# EAGLE board INVERTER (EAGLE 7.5.0)
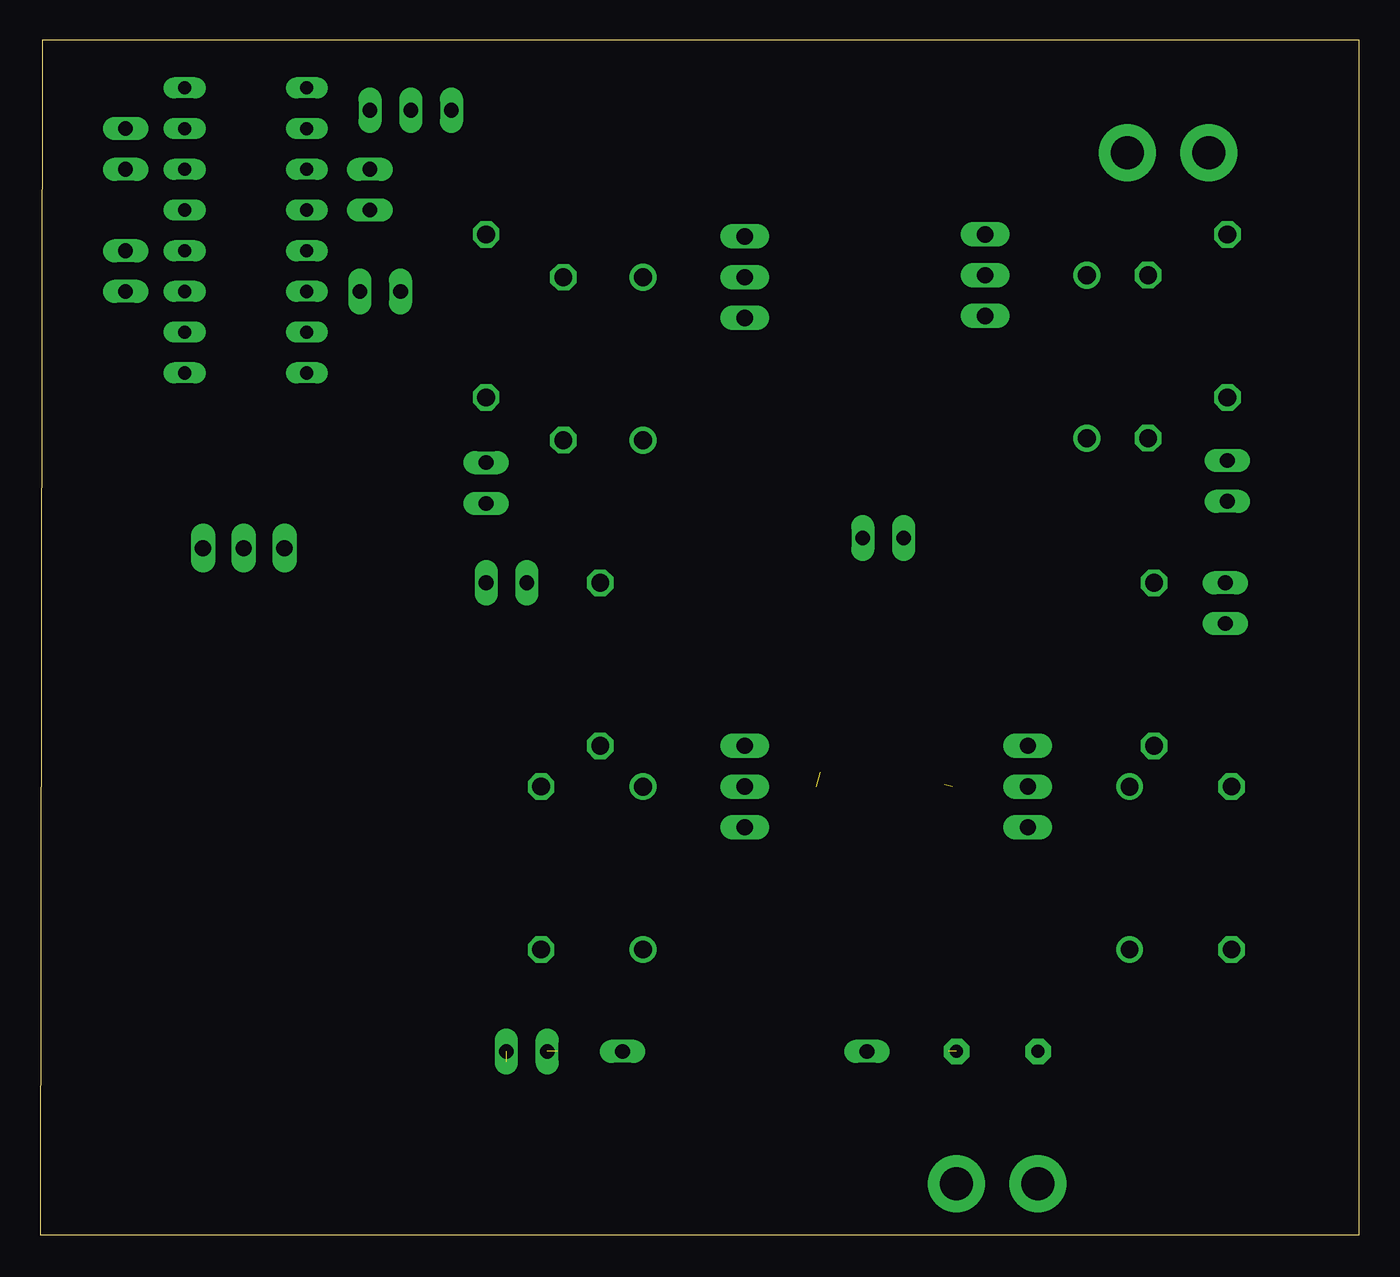
[diagram p0: board, top side]
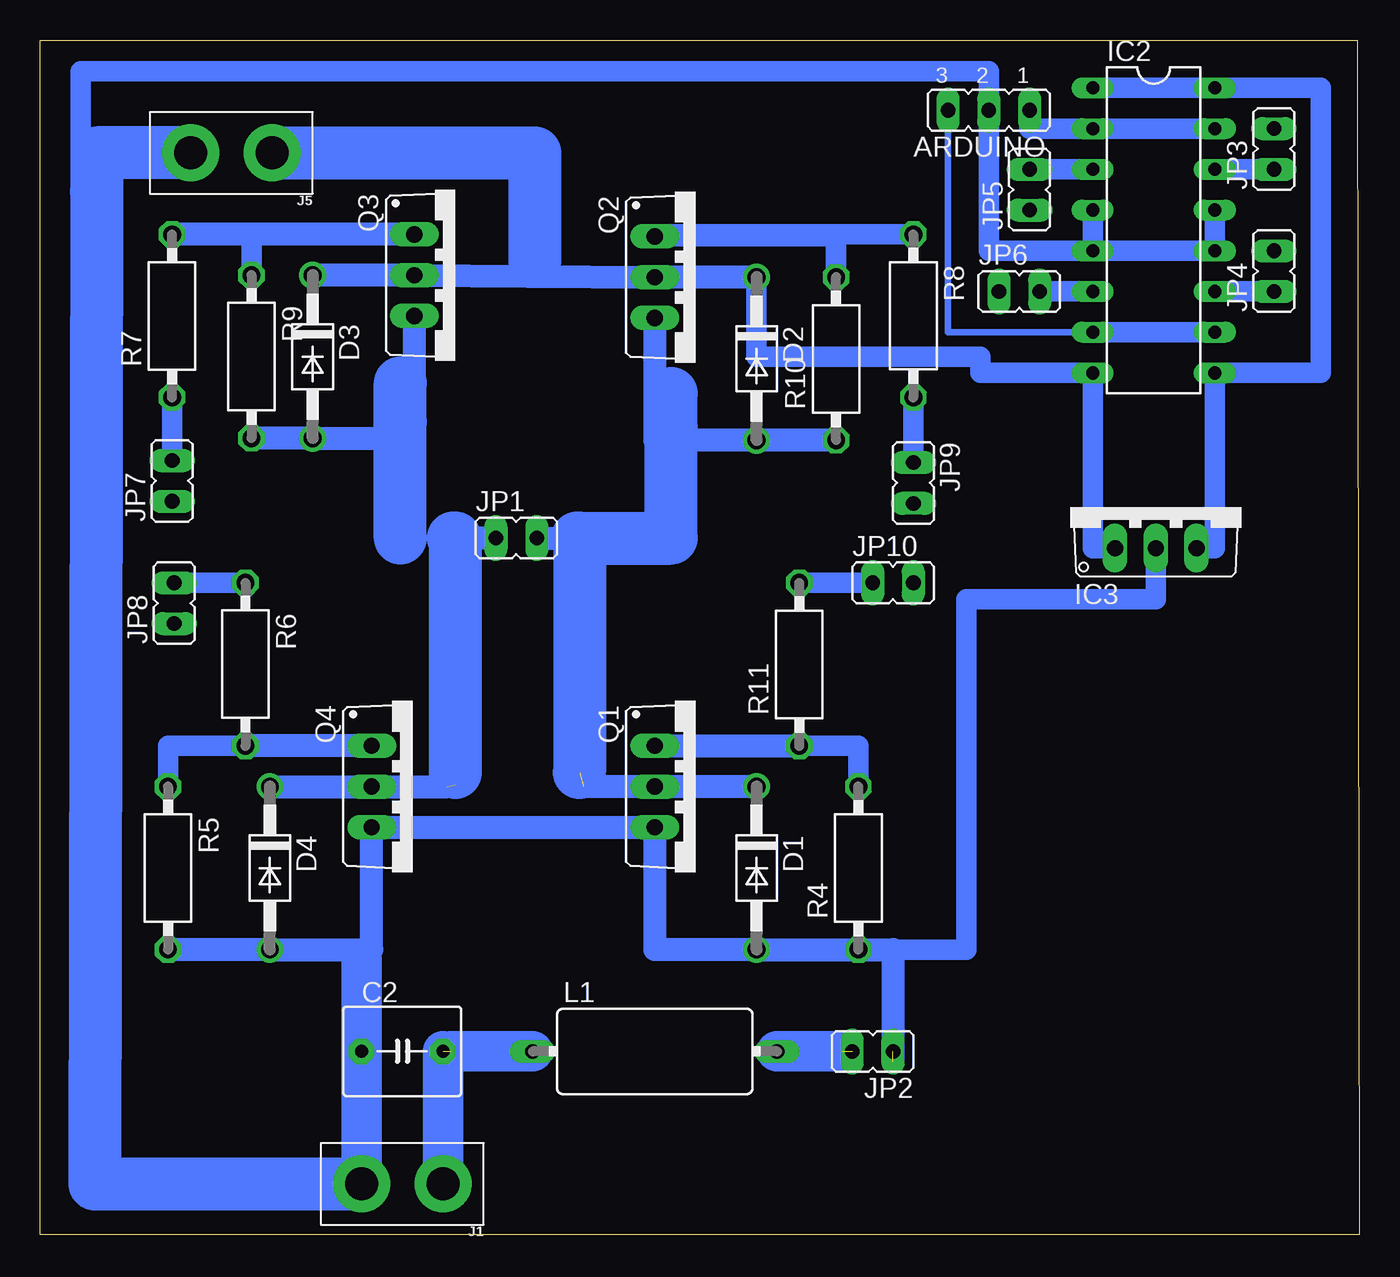
[diagram p1: board, bottom side, seen from below]

Size 82.28 x 74.47 mm. Coordinates in mm from the lower left corner, seen from the top.
Outline: 0,0 82.28,0 82.28,74.47 0.13,74.47 0,0
Copper layers (1*16): Top 0.035mm / dielectric 1.5mm / Bottom 0.035mm
Design rules "default": minimum track width 10mil, minimum drill 24mil, track to track 8mil, track to pad 8mil, pad to pad 8mil, via to via 8mil, smd to smd 8mil, copper to edge 40mil, drill to drill 8mil, minimum pad ring 10mil, minimum via ring 8mil, stop-mask expansion 4mil, vias tented up to drill 0mil, thermal gap 10mil

## Footprints (pad centres in the part's own frame; a part is rotated, then mirrored left to right if it is on the bottom)
JP2 = drill 0.914 long: 1 -2.54,0; 2 0,0; 3 2.54,0
C5B5.5 = drill 0.813 pad 1.6 octagon: 1 -2.54,0; 2 2.54,0
DO41-10 = drill 1.118: A 5.08,0; C -5.08,0
DIL16 = drill 0.813 long: 1 -8.89,-3.81; 2 -6.35,-3.81; 3 -3.81,-3.81; 4 -1.27,-3.81; 5 1.27,-3.81; 6 3.81,-3.81; 7 6.35,-3.81; 8 8.89,-3.81; 9 8.89,3.81; 10 6.35,3.81; 11 3.81,3.81; 12 1.27,3.81; 13 -1.27,3.81; 14 -3.81,3.81; 15 -6.35,3.81; 16 -8.89,3.81
TO220V = drill 1.016 long: 1 -2.54,-2.54; 2 0,-2.54; 3 2.54,-2.54
1X02_XTRA_BIG = drill 2.057 pad 3.556: 1 -2.54,0; 2 2.54,0
JP1 = drill 0.914 long: 1 0,-1.27; 2 0,1.27
LBC15 = drill 0.914 long: 1 -7.62,0; 2 7.62,0
TO220BV = drill 1.016 long: D 0,-2.54; G -2.54,-2.54; S 2.54,-2.54
VMTA55 = drill 1.1 octagon: 1 -5.08,0; 2 5.08,0

## Placement (x,y rotation side)
ARDUINO  [JP2]  23.11,70.1 180 bottom
C2  [C5B5.5]  59.69,11.43 0 bottom
D1  1N4004  [DO41-10]  37.59,22.86 270 bottom
D2  1N4004  [DO41-10]  37.59,54.61 270 bottom
D3  1N4004  [DO41-10]  65.28,54.74 270 bottom
D4  1N4004  [DO41-10]  67.94,22.86 270 bottom
IC2  L293D  [DIL16]  12.83,62.61 270 bottom
IC3  7805TV  [TO220V]  12.7,45.34 0 bottom
J1  [1X02_XTRA_BIG]  59.69,3.18 180 bottom
J5  [1X02_XTRA_BIG]  70.36,67.44 180 bottom
JP1  [JP1]  52.58,43.43 270 bottom
JP2  [JP1]  30.35,11.43 90 bottom
JP3  [JP1]  5.33,67.69 0 bottom
JP4  [JP1]  5.33,60.07 0 bottom
JP5  [JP1]  20.57,65.15 0 bottom
JP6  [JP1]  21.21,58.8 270 bottom
JP7  [JP1]  74.04,46.99 0 bottom
JP8  [JP1]  73.91,39.37 0 bottom
JP9  [JP1]  27.81,46.86 180 bottom
JP10  [JP1]  29.08,40.64 270 bottom
L1  LBC15  [LBC15]  43.94,11.43 0 bottom
Q1  IRF740  [TO220BV]  41.4,27.94 270 bottom
Q2  IRF740  [TO220BV]  41.4,59.69 270 bottom
Q3  IRF740  [TO220BV]  56.39,59.82 270 bottom
Q4  IRF740  [TO220BV]  59.05,27.94 270 bottom
R4  [VMTA55]  31.24,22.86 90 bottom
R5  [VMTA55]  74.29,22.86 270 bottom
R6  [VMTA55]  69.47,35.56 270 bottom
R7  [VMTA55]  74.04,57.28 90 bottom
R8  [VMTA55]  27.81,57.28 270 bottom
R9  [VMTA55]  69.09,54.74 270 bottom
R10  [VMTA55]  32.64,54.61 90 bottom
R11  [VMTA55]  34.92,35.56 90 bottom

## Library data of the parts
ARDUINO JP1-JP10 = jumper
C2 = capacitor-wima
D1-D4 = diode
IC2 = st-microelectronics; MPN: L293D; OC_FARNELL: 9589619; OC_NEWARK: 56P8249
IC3 = linear
J1 J5 = SparkFun-Connectors
L1 = inductors
Q1-Q4 = transistor-power
R4-R11 = rcl

## Nets
GND: ARDUINO.2 C2.1 D1.A D4.A IC2.4 IC2.5 IC2.12 IC2.13 IC3.2 J1.2 J5.2 JP2.1 Q1.S Q4.S R4.1 R5.2
IN1: ARDUINO.1 IC2.2 IC2.15
IN2: ARDUINO.3 IC2.7 IC2.10
LIVE: C2.2 J1.1 L1.1
N$2: IC2.3 JP5.2
N$3: IC2.6 JP6.2
N$4: Q2.G R8.1 R10.2
N$5: Q1.G R4.2 R11.1
N$6: JP7.2 R7.1
N$7: IC2.11 JP4.1
N$8: Q4.G R5.1 R6.2
N$9: Q3.G R7.2 R9.1
N$10: JP8.2 R6.1
N$11: JP9.1 R8.2
N$12: JP10.1 R11.2
N$15: IC2.14 JP3.1
OUT_Q1: JP5.1
OUT_Q2: JP6.1
OUT_Q3: JP4.2
OUT_Q4: JP3.2
S$1: D3.A Q3.S R9.2
SIDE1: D4.C JP1.1 Q4.D
SIDE2: D1.C D2.A JP1.2 Q1.D Q2.S R10.1
TRANSFORMER02: JP2.2 L1.2
VIN: D2.C D3.C IC2.8 IC3.1 J5.1 Q2.D Q3.D
VO_LM7805: IC2.1 IC2.9 IC2.16 IC3.3

## Tracks (layer width: path | path; a pad name or v marks a point on that pad's centre or on a via)
GND  (1 unrouted)
  Bottom 1.27: IC2.13 IC2.12 IC2.5 | IC2.5 IC2.4 | IC2.5 16,61.34 | IC2.5 23.11,61.34 ARDUINO.2 23.11,72.52 79.76,72.52 79.76,65.28 78.75,65.28 78.75,65.02 | IC3.2 12.7,39.62 24.51,39.62 24.51,17.78 29.08,17.78 | 62.23,17.14 61.98,17.14 61.98,17.78
  Bottom 1.422: R5.2 D4.A 61.98,17.78 61.59,17.78 Q4.S Q1.S 43.94,17.78 D1.A R4.1 29.08,17.78 29.08,10.8
  Bottom 2.54: J1.2 C2.1 62.23,17.14
  Bottom 3.302: J5.2 78.74,67.44 78.75,65.02 78.87,3.18 J1.2
IN1
  Bottom 1.27: IC2.15 IC2.2 20.57,68.96 ARDUINO.1
IN2
  Bottom 0.406: IC2.7 25.65,56.26 ARDUINO.3
  Bottom 1.27: IC2.10 IC2.7
LIVE  (1 unrouted)
  Bottom 2.54: L1.1 56.64,11.43 | J1.1 C2.2
N$2
  Bottom 1.27: JP5.2 IC2.3
N$3
  Bottom 1.27: JP6.2 IC2.6
N$4
  Bottom 1.27: R10.2 32.64,62.23 Q2.G 43.94,62.36 R8.1
N$5
  Bottom 1.27: R4.2 31.24,30.48 R11.1
  Bottom 1.422: Q1.G R11.1
N$6
  Bottom 1.27: R7.1 JP7.2
N$7
  Bottom 1.27: IC2.11 JP4.1
N$8
  Bottom 1.27: R6.2 74.29,30.48 R5.1
  Bottom 1.422: Q4.G R6.2
N$9
  Bottom 1.27: R9.1 69.09,62.36
  Bottom 1.422: Q3.G 69.09,62.36 R7.2
N$10
  Bottom 1.27: R6.1 JP8.2
N$11
  Bottom 1.27: R8.2 JP9.1
N$12
  Bottom 1.27: R11.2 JP10.1
N$15
  Bottom 1.27: IC2.14 JP3.1
S$1
  Bottom 1.27: 59.82,50.67 59.82,49.66 58.93,49.66
  Bottom 1.422: Q3.S 58.93,49.66 D3.A R9.2
  Bottom 3.302: 59.82,43.43 59.82,50.67 59.82,53.09
SIDE1  (1 unrouted)
  Bottom 1.27: 56.39,28.83 56.51,28.83 56.51,28.45 56.39,28.45 56.39,28.07
  Bottom 1.422: D4.C Q4.D 56.9,27.94 | JP1.1 56.51,43.43
  Bottom 3.302: 56.51,43.43 56.39,43.43 56.39,28.83
SIDE2  (1 unrouted)
  Bottom 1.27: 43.94,49.53 42.93,49.53 42.93,50.29
  Bottom 1.422: R10.1 D2.A 43.94,49.53 Q2.S | JP1.2 48.77,43.43 | D1.C Q1.D 48.39,27.94
  Bottom 3.302: 48.64,43.43 42.93,43.43 42.93,50.29 42.93,52.45 | 48.77,43.43 48.64,43.43 | 48.64,43.43 48.64,28.83
TRANSFORMER02  (1 unrouted)
  Bottom 2.54: L1.2 32.26,11.43
VIN
  Bottom 0.406: D2.C 38.23,59.69 38.23,59.31 37.72,59.31
  Bottom 1.27: IC3.1 16.64,42.8 IC2.8 23.62,53.72 23.62,54.74 37.59,54.74 D2.C | 51.43,60.71 51.95,60.71 51.95,59.76
  Bottom 1.422: Q2.D 51.95,59.76 Q3.D D3.C | Q2.D 43.18,59.69 | D2.C Q2.D
  Bottom 3.302: J5.1 51.43,67.44 51.43,60.71
VO_LM7805
  Bottom 1.27: IC2.1 IC2.16 2.41,71.5 2.41,53.72 IC2.9 9.02,42.8 IC3.3